# Altium PCB PCB1.PcbDoc
Units mil, origin at the board's own origin, x right, y up, seen from the top; angles counter-clockwise.
Board outline 1181.1 x 590.55 mil, 4 copper layers (Top Layer, gnd1, gnd2, Bottom Layer), stack 62.33 mil thick; 24 components, 18 nets, 101 pads, 65 vias.
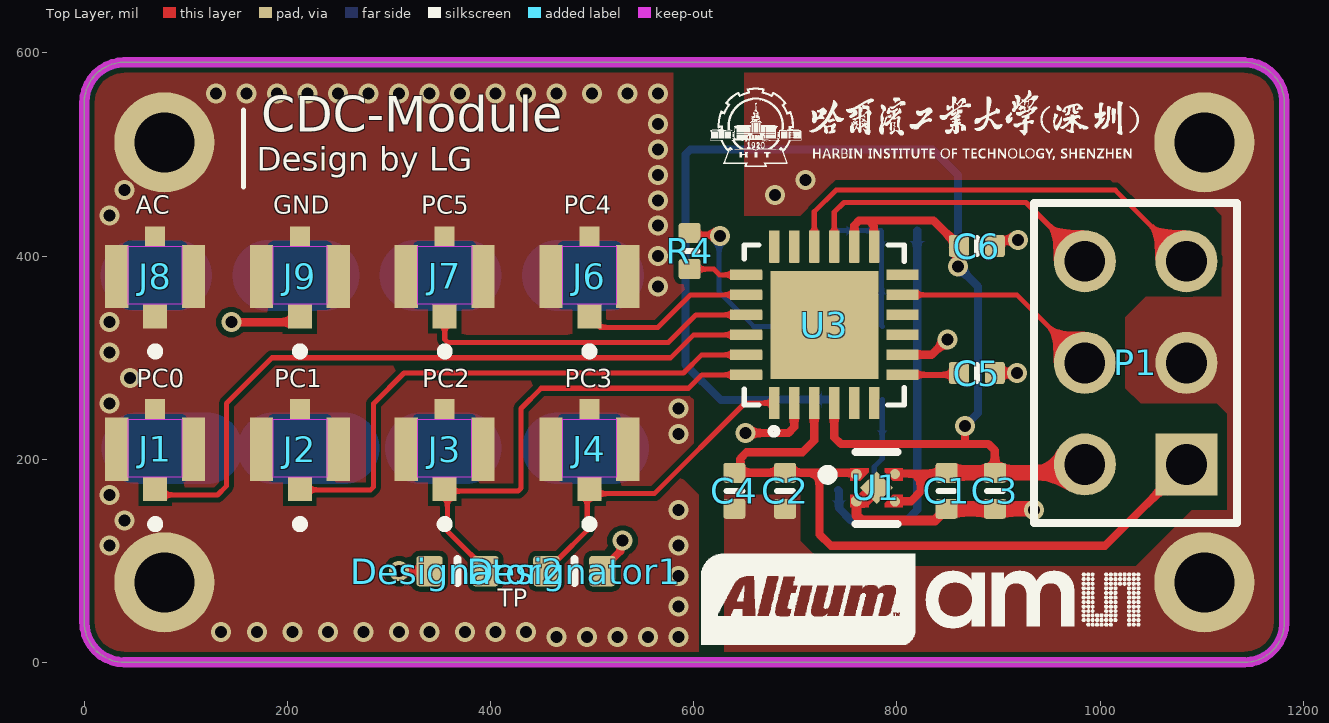
[diagram p0: Top Layer view]
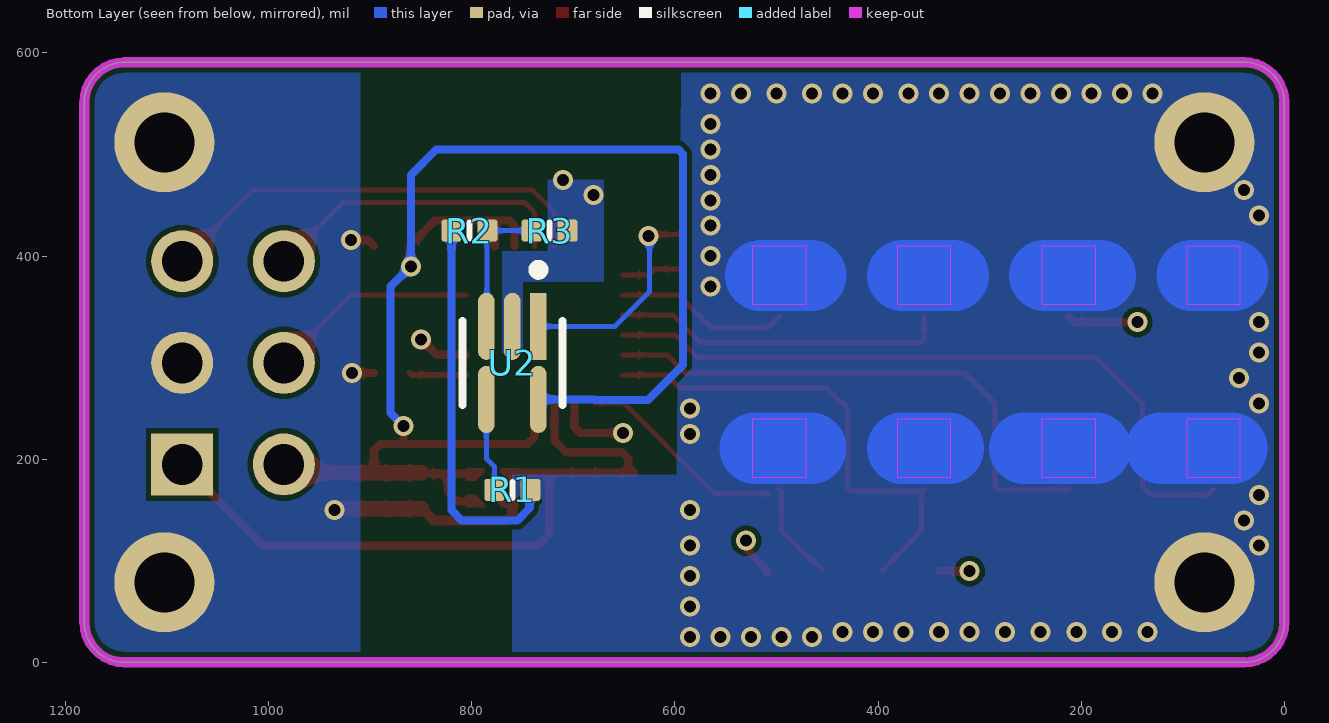
[diagram p1: Bottom Layer view, seen from below]
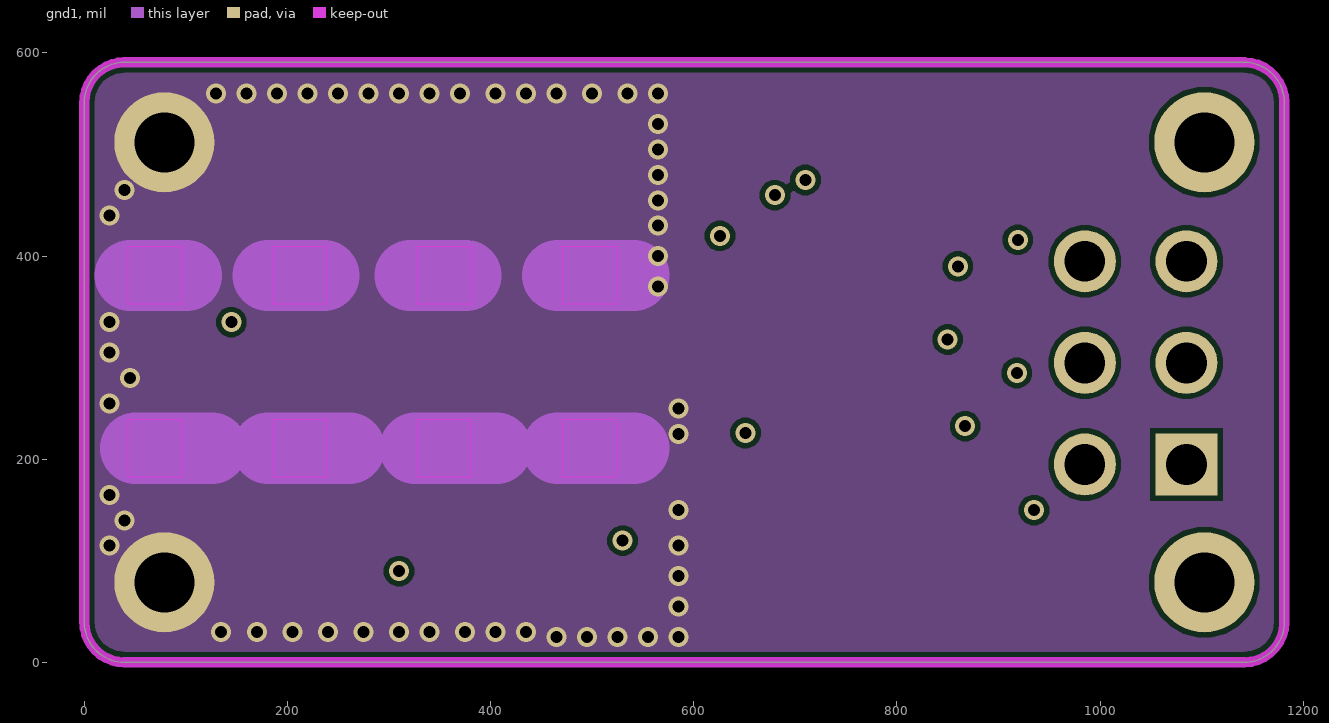
[diagram p2: gnd1]
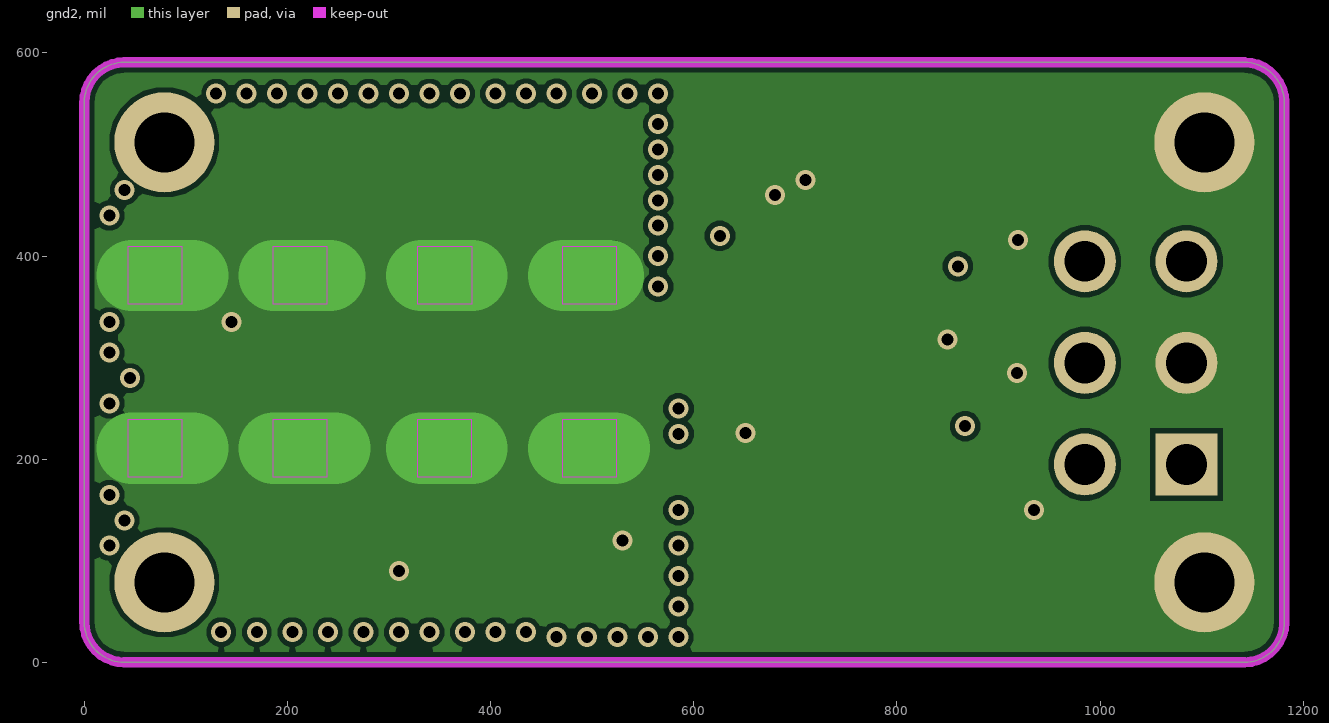
[diagram p3: gnd2]
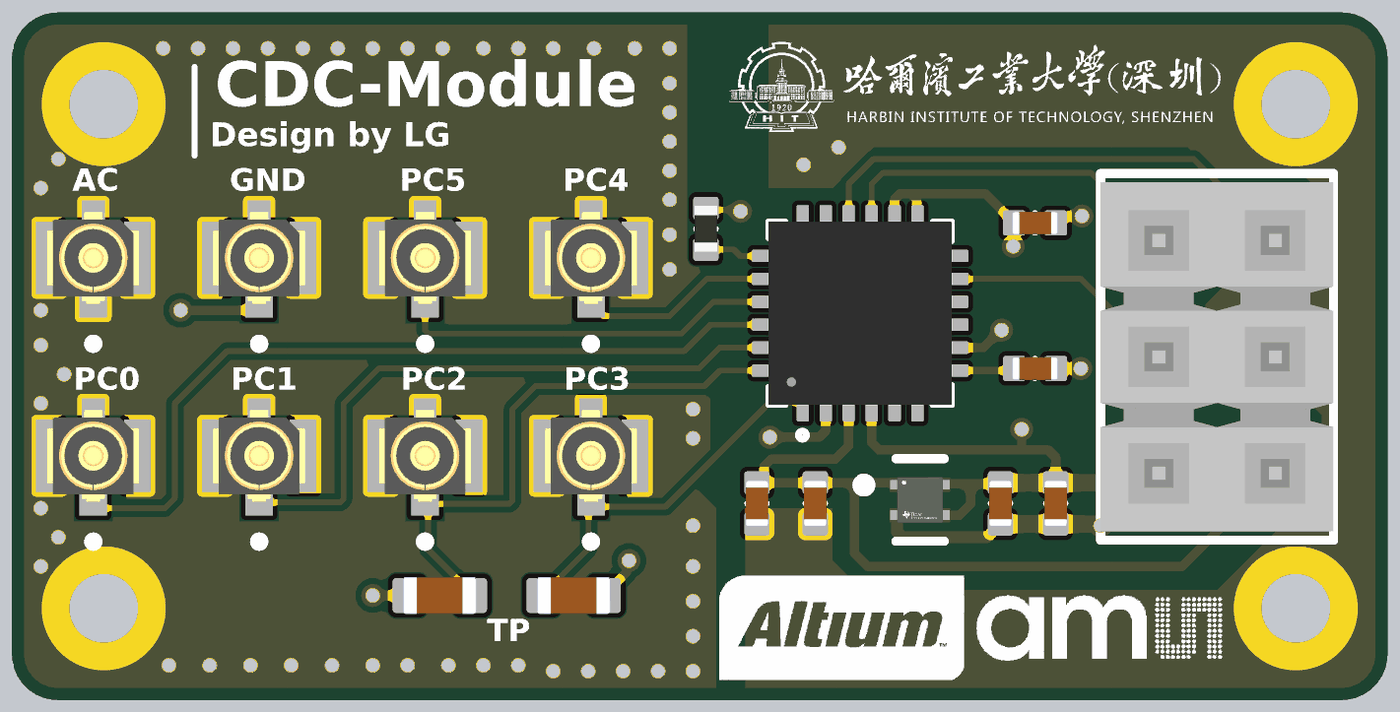
[diagram p4: 3D render of the assembled board from above, using the file's embedded part models]
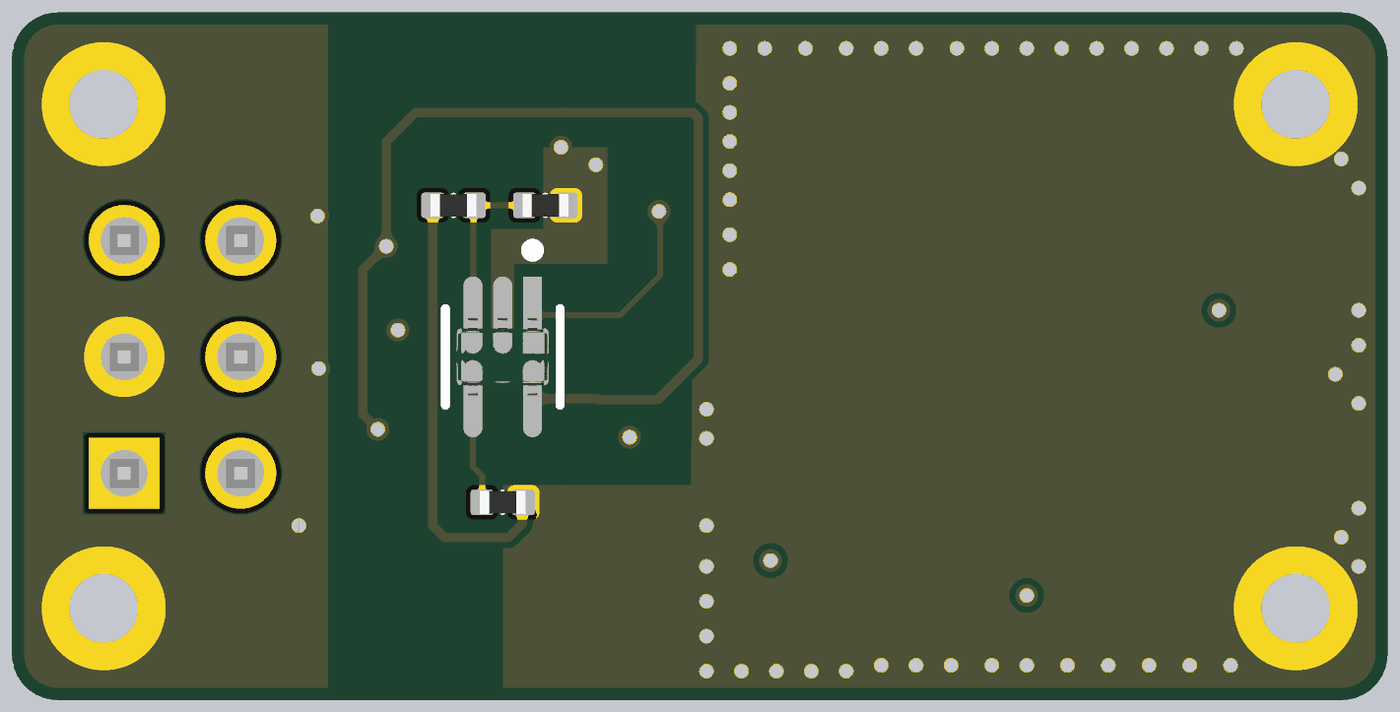
[diagram p5: 3D render of the assembled board from below, using the file's embedded part models]

## Layer stack, top to bottom
Top Solder: solder mask 0.4, Solder Resist, Dk 3.5
Top Layer: signal copper 1.4
Dielectric 2: prepreg 8.2, PP-006, Dk 4.1
gnd1: signal copper 0.6
Dielectric 1: dielectric 41.93, FR-4, Dk 4.8
gnd2: signal copper 0.6
Dielectric 3: prepreg 8.2, PP-006, Dk 4.1
Bottom Layer: signal copper 1.4
Bottom Solder: solder mask 0.4, Solder Resist, Dk 3.5

## Board outline
0.25,39.62 0.25,551.43 cw(c39.62,551.43) 39.62,590.8 1141.98,590.8 cw(c1141.98,551.43) 1181.35,551.43 1181.35,39.62 cw(c1141.98,39.62) 1141.98,0.25 39.62,0.25 cw(c39.62,39.62)

## Design rules (kind name [scope] priority, off if disabled: settings)
Clearance [All] p1: gap=5 ignorepadtopadclearanceinfootprint=FALSE except(8: Arc-Hole Track-Hole SMDPad-Hole THPad-Hole Via-Hole Fill-Hole Poly-Hole Region-Hole Text-Hole)
PlaneConnect [All] p1: planeconnectstyle=Direct reliefexpansion=20 reliefentries=4 reliefconductorwidth=10 reliefairgap=10
PolygonConnect [All] p1: connectstyle=Direct reliefconductorwidth=10 reliefentries=4 polygonreliefangle="90 Angle" airgapwidth=10
RoutingVias [All] p1: holewidth=11.81 width=19.68 viastyle="Through Hole" minholewidth=11.81 minwidth=19.68 maxholewidth=11.81 maxwidth=19.68
SolderMaskExpansion [All] p1: expansion=4 istentingtop=FALSE
Width [All] p1: maxlimit=100 minlimit=4 preferedwidth=5
29 further rules are at their usual default settings.

## Classes and differential pairs
component class Sheet1: C1 C2 C3 C4 C5 C6 J1 R2 R3 U2 U3

## Components (designator, comment, footprint, x,y, rotation, side; value= is the part's Value field where it differs from the comment)
C1 "Capacitor 1µF +/-20% 10V 0402" CAPC0402(1005)60_L 849.04,169.09 r270 top value=1µF
C2 "Capacitor 1µF +/-20% 10V 0402" CAPC0402(1005)60_L 690,169.09 r270 top value=1µF
C3 "Capacitor 10µF +/-40% 6.3V 0402" CAPC0402(1005)60_L 896.45,169.09 r90 top value=10uF
C4 "Capacitor 10µF +/-40% 6.3V 0402" CAPC0402(1005)60_L 640,169.09 r90 top value=4.7uF
C5 "Capacitor 10nF +/-20% 50V 0402" CAPC0402(1005)60_L 878.73,285 r180 top value=10nF
C6 "Capacitor 10µF +/-40% 6.3V 0402" CAPC0402(1005)60_L 878.73,410 r180 top value=10uF
Designator1 "Comment" CAPC0603(1608)100_L 482.56,90 r0 top
Designator2 "Comment" CAPC0603(1608)100_L 367.56,90 r180 top
J1 "PC0-PORT" LINX_CONMHF4-SMD-G-T 70,210 r0 top
J2 "PC1-PORT" LINX_CONMHF4-SMD-G-T 212.45,210 r0 top
J3 "PC2-PORT" LINX_CONMHF4-SMD-G-T 354.91,210 r0 top
J4 "PC3-PORT" LINX_CONMHF4-SMD-G-T 497.36,210 r0 top
J6 "PC4-PORT" LINX_CONMHF4-SMD-G-T 497.36,380 r0 top
J7 "PC5-PORT" LINX_CONMHF4-SMD-G-T 355,380 r0 top
J8 "EXT-Shield" LINX_CONMHF4-SMD-G-T 70,380 r0 top
J9 "GND" LINX_CONMHF4-SMD-G-T 212.45,380 r0 top
P1 "TSW-103-08-L-D" SMTC-TSW-103-08-X-D 1085,195 r90 top locked
R1 "Resistor 10R  +/-1 % 0402 63 mW" RESC0402(1005)_L 760,170 r180 bottom value=68R
R2 "Resistor 10R  +/-1 % 0402 63 mW" RESC0402(1005)_L 802.28,425.17 r0 bottom value=220R
R3 "Resistor 10R  +/-1 % 0402 63 mW" RESC0402(1005)_L 723.38,425.17 r0 bottom value=47K
R4 "Resistor 10R  +/-1 % 0402 63 mW" RESC0402(1005)_L 596.11,405 r90 top value=0R
U1 "LP5907SNX-1.8/NOPB" FP-DQN0004A-MFG 780,172.05 r0 top
U2 "TLV9051IDCKR" FP-DCK0005A-IPC_A 760,295 r270 bottom
U3 "PCAP04" QFN-24-PAD 728.56,332.45 r90 top locked

## Footprints (in the part's own frame and the unit in brackets; to place one, negate y for a bottom-side part, rotate by r counter-clockwise, add the part's x,y. Pads: shape width x height; smd on the part's side, far side on the other; paste and mask are expansions set on the pad)
CAPC0402(1005)60_L [mm] "Chip Capacitor, Body 1.0x0.5mm, Height 0.6mm, IPC High Density"
  rrect25% 0.5x0.55 smd: 1(-0.45,0) 2(0.45,0)
  silkscreen extent 0,-0.2 0,0.2, body extent -0.5,-0.25 0.5,0.25, height 0.6
CAPC0603(1608)100_L [mm] "Chip Capacitor, Body 1.6x0.8mm, Height 1.0mm, IPC High Density"
  rrect25% 0.66x0.76 smd: 1(-0.7,0) 2(0.7,0)
  silkscreen extent 0,-0.3 0,0.3, body extent -0.8,-0.4 0.8,0.4, height 0.95
FP-DCK0005A-IPC_A [mm]
  rect 1.677x0.416 smd paste+0 mask+0: 1(-0.914,0.65)
  rrect100% 1.677x0.416 smd paste+0 mask+0: 2(-0.914,0) 3(-0.914,-0.65) 4(0.914,-0.65) 5(0.914,0.65)
  silkscreen extent -2.45,-1.25 1.05,1.25, body extent -1.1,-1 1.1,1, height 1.1
FP-DQN0004A-MFG [mm]
  round 0.279 smd paste-1000 mask-1000: 1(-0.505,0.33) 2(-0.505,-0.33)
  round 0.251 smd paste-1000 mask-1000: 3(0.459,-0.346) 4(0.459,0.346)
  rect 0.58x0.58 smd rot 135 paste-1000 mask-1000: 5(0,0)
  Top Layer region: -0.66,-0.485 -0.2,-0.485 -0.2,-0.385 -0.41,-0.175 -0.66,-0.175
  Top Layer region: 0.66,0.485 0.2,0.485 0.2,0.385 0.41,0.175 0.66,0.175
  Top Layer region: 0.66,-0.485 0.2,-0.485 0.2,-0.385 0.41,-0.175 0.66,-0.175
  Top Layer region: -0.66,0.485 -0.2,0.485 -0.2,0.385 -0.41,0.175 -0.66,0.175
  silkscreen extent -1.35,-0.9 0.53,0.9, body extent -0.76,-0.63 0.76,0.63, height 0.25
LINX_CONMHF4-SMD-G-T [mm]
  rect 0.6x0.6 smd: 1(0,-1)
  rect 0.58x1.58 smd: S1(-0.96,0) S3(0.96,0)
  rect 0.5x0.5 smd: S2(0,1)
  Keep-Out Layer region: 0.67,-0.7 -0.67,-0.7 -0.67,0.75 0.67,0.75
  Keep-Out Layer region: 0.67,-0.7 -0.67,-0.7 -0.67,0.75 0.67,0.75
  Keep-Out Layer region: 0.67,-0.7 -0.67,-0.7 -0.67,0.75 0.67,0.75
  silkscreen extent -0.1,-1.97 0.1,-1.77, body extent -1,-1 1,1, height 0.6
QFN-24-PAD [mm]
  rrect21% 0.81x0.27 smd: 1(-1.955,1.25) 2(-1.955,0.75) 3(-1.955,0.25) 4(-1.955,-0.25) 5(-1.955,-0.75) 6(-1.955,-1.25) 13(1.955,-1.25) 14(1.955,-0.75) 15(1.955,-0.25) 16(1.955,0.25) 17(1.955,0.75) 18(1.955,1.25)
  rrect21% 0.27x0.81 smd: 7(-1.25,-1.955) 8(-0.75,-1.955) 9(-0.25,-1.955) 10(0.25,-1.955) 11(0.75,-1.955) 12(1.25,-1.955) 19(1.25,1.955) 20(0.75,1.955) 21(0.25,1.955) 22(-0.25,1.955) 23(-0.75,1.955) 24(-1.25,1.955)
  rect 2.7x2.7 smd paste-0.495: NC(0,0)
  silkscreen extent -2.74,-2 2,2, body extent -2.01,-2.01 2.01,2.01, height 0.86
RESC0402(1005)_L [mm] "Chip Resistor, Body 1.0x0.5mm, IPC High Density"
  rrect25% 0.5x0.55 smd: 1(-0.45,0) 2(0.45,0)
  silkscreen extent 0,-0.2 0,0.2, body extent -0.5,-0.25 0.5,0.25, height 0.3
SMTC-TSW-103-08-X-D [mm] ".025 SQ Post Terminal Strip Assembly, 2x3 Pins, Vertical, 2.54mm Pitch, Male"
  rect 1.55x1.55 hole 1.02: 1(0,0)
  round 1.55 hole 1.02: 2(0,2.54) 3(2.54,0) 4(2.54,2.54) 5(5.08,0) 6(5.08,2.54)
  silkscreen extent -1.46,-1.27 6.54,3.81, body extent -1.27,-1.27 6.35,3.81, height 8.38

## Part data
C1 C2: library part CMP-001-00063-3, "Chip Capacitor, 1µF +/-20%, 10V, 0402, Thickness 0.6 mm", Case/Package=0402, Max Operating Temperature=85°C, Min Operating Temperature=-55°C, Tolerance=10%, Voltage Rating=10V, Mounting Technology=SMT, Pins=2
C3 C4 C6: library part CMP-001-00074-3, "Chip Capacitor, 10µF +/-40%, 6.3V, 0402, Thickness 0.6 mm", Case/Package=0402, Max Operating Temperature=85°C, Min Operating Temperature=-55°C, Tolerance=10%, Voltage Rating=6.3V, Mounting Technology=SMT, Pins=2
C5: library part CMP-001-00069-3, "Chip Capacitor, 10nF +/-20%, 50V, 0402, Thickness 0.6 mm", Case/Package=0402, Max Operating Temperature=85°C, Min Operating Temperature=-55°C, Tolerance=5%, Voltage Rating=50V, Mounting Technology=SMT, Pins=2
J1 J2 J3 J4 J6 J7 J8 J9: library part CMP-002-00072-1, "IPEX MHF4 Connector Jack, Male Pin 50Ohm Surface Mount Solder", Case/Package=None, Availability="In Stock", Check_prices=https://www.snapeda.com/parts/CONMHF4-SMD-G-T/Linx/view-part/?ref=eda, Component Type=Standard, Design Item ID=CONMHF4-SMD-G-T, MF="Linx Technologies Inc.", MP=CONMHF4-SMD-G-T, Pins=4, Price=None, Purchase-URL=https://pricing.snapeda.com/search/part/CONMHF4-SMD-G-T/?ref=eda, SnapEDA_Link=https://www.snapeda.com/parts/CONMHF4-SMD-G-T/Linx/view-part/?ref=snap, Source=CONMHF4-SMD-G-T.SchLib
P1: library part CMP-1024-00336-1, "0.025\" SQ Post Header, Through-hole, Vertical, -55 to 125 degC, 2.54 mm Pitch, 6-Pin, Male, RoHS", Manufacturer=Samtec, Temperature Range="-55 to 125 degC", ComponentLink1Description="Manufacturer URL", ComponentLink1URL=http://www.samtec.com, ComponentLink2Description=Datasheet, ComponentLink2URL=http://www.samtec.com/documents/webfiles/pdf/TSW_TH.PDF, ComponentLink3Description="Package Specification", ComponentLink3URL=http://www.samtec.com/documents/webfiles/cpdf/TSW-XXX-XX-XXX-X-XX-XXX-MKT.pdf, DatasheetVersion=F-214, Mounting Technology=Through-hole, Orientation=Vertical, PackageDescription=".025[0.64] SQ. Post Terminal Strip Assembly", PackageReference=TSW-103-08-X-D, PackageVersion="DM, 8/1988", PartNumber=TSW-103-08-L-D, Pitch="2.54 mm", RoHS=True
R1 R2 R3 R4: library part CMP-009-00152-3, "Chip Resistor, 10 Ohms, +/-1 %, 63 mW, -55 to 155 degC, 0402", Case/Package=0402, Max Operating Temperature=155°C, Min Operating Temperature=-55°C, Power=63mW, Tolerance=1%, Pins=2
U1: library part CMP-04917-000185-2, "None"
U2: library part CMP-04895-000451-1, "IC OPAMP GP 1 CIRCUIT SC70-5"
U3: "CDC IC"

## Free pads (board coordinates)
  round 98.43 hole 59.06: 1(78.99,78.99) 1(78.99,512.06) 1(1102.61,78.99) 1(1102.61,512.06)

## Via types
v1: diameter 19.68, hole 11.81, Top Layer to Bottom Layer, tented both sides, 65 vias

## Nets (pads, with @x,y where several pads share a name; then routed paths per layer and width w, separated by ;. In a path a pad name is that pad's centre, name@x,y a point inside that pad or via, vN(x,y) a via of type N, cw(c..) or ccw(c..) an arc to the next point about the centre after c; other vN are vias at no path point)
1V8: C2.1 C4.2 P1.1 U1.1 U3.3 | length 714
  Top Layer w8: U3.3 718.72,218.72 707,207 652,207 646,201 646,192.65 640.16,186.81 C4.2 C2.1 723.77,186.81 ; U1.1 759.31,185.04 757.54,186.81 723.77,186.81 ; P1.1 1005,115 735,115 723.77,126.23 723.77,186.81
3V3: C1.1 C3.2 C6.2 P1.2 U1.3 U1.4 U2.5 U3.4 U3.13 U3.14 | length 1566.2
  Top Layer w8: U3.4 738.41,221.59 745,215 870,215 ; U3.14 758.09,430.31 762.78,435 772.41,435 ; U3.13 777.09,410.1 777.09,430.31 772.41,435 ; U1.3 798.44,158.8 813.8,158.8 823.34,168.34 823.34,186.01 ; U1.4 798.44,186.01 823.34,186.01 ; C1.1 848.24,186.01 823.34,186.01 ; v1(860,390) 861.01,391.01 C6.2 861.01,410.98 855.17,416.83 854.19,416.83 836.01,435 772.41,435 ; v1(867.24,232.76) 867.24,217.76 870,215 ; C3.2 896.45,208.55 890,215 870,215
  Top Layer w15: C1.1 C3.2 976.81,186.81 P1.2
  Bottom Layer w8: U2.5 678.97,259.03 678.25,258.31 626.69,258.31 592,293 592,500.31 596.69,505 835,505 860,480 v1(860,390) 880,370 880,245.53 v1(867.24,232.76)
AC-Shield: J1.S1 J1.S2 J1.S3 J2.S1 J2.S2 J2.S3 J3.S1 J3.S2 J3.S3 J4.S1 J4.S2 J4.S3 J6.S1 J6.S2 J6.S3 J7.S1 J7.S2 J7.S3 J8.1 J8.S1 J8.S2 J8.S3 J9.S1 J9.S2 J9.S3 pad.1@78.99,78.99 pad.1@78.99,512.06 R1.2 R2.2 | length 1374.1
  Top Layer w8: pad.1@72.28,85.7 pad.1@78.99,78.99
  gnd1 w70: 45.5,381 101,381 ; 50.5,211 126,211 ; 181,211 261,211 ; 181,381 236,381 ; 321,381 376,381 ; 326,211 406,211 ; 466,211 541,211 ; 466,381 541,381
  Bottom Layer w8: R1.2 743.14,169.14 743.14,151.86 755,140 810,140 820,150 R2.2
  Bottom Layer w70: 51,381 91,381 ; 52,211 121,211 ; 181,381 236,381 ; 186,211 256,211 ; 326,381 376,381 ; 331,211 376,211 ; 466,211 521,211 ; 466,381 516,381
  other v1: 465,25 495,25 525,25 555,25 585,25 135,30 170,30 205,30 240,30 275,30 310,30 340,30 375,30 405,30 435,30 585,55 585,85 25,115 585,115 40,140 585,150 25,165 585,225 585,250 25,255 45,280 25,305 25,335 565,370 565,400 565,430 25,440 565,455 40,465 565,480 565,505 565,530 130,560 160,560 190,560 220,560 250,560 280,560 310,560 340,560 370,560 405,560 435,560 465,560 500,560 535,560 565,560
GND: C1.2 C2.2 C3.1 C4.1 C5.1 C6.1 Designator1.2 Designator2.2 J9.1 P1.3 pad.1@1102.61,78.99 pad.1@1102.61,512.06 R3.1 U1.2 U1.5 U2.2 U3.2 U3.8 | length 963.3
  Top Layer w8: v1(145,335) 206.82,335 J9.1 ; v1(310,90) Designator2.2 ; Designator1.2@508.35,88.23 Designator1.2 510.12,91.96 527.76,109.61 527.76,117.76 v1(530,120) ; v1(651,226) 693.35,226 699.03,231.69 U3.2 ; U1.2 760.69,159.63 766.59,159.63 ; U1.5@779.02,172.05 U1.5 ; U3.8 834.19,302.92 849.26,318 v1(850,318) ; C1.2@842.21,144.69 842.21,145.54 848.05,151.38 C1.2 ; C5.1 v1(918,285) ; C6.1 896.45,410.16 902.29,416 v1(919,416) ; v1@933.62,151.38 v1(935,150)
  Top Layer w10: U1.2 760.12,144.69 764.8,140 837.52,140 C1.2@842.21,144.69
  Top Layer w15: 766.59,159.63 U1.5@779.02,172.05 ; C1.2 C3.1 v1@933.62,151.38
  gnd2 w70: 47,211 107,211 ; 47,381 107,381 ; 187,211 247,211 ; 187,381 242,381 ; 332,211 382,211 ; 332,381 382,381 ; 472,211 522,211 ; 472,381 516,381
  other v1: 680,460 710,475
I2C_SCL: P1.5 U3.16 | length 438.4
  Top Layer w5: U3.16 718.72,443.72 740,465 1015,465 P1.5
I2C_SDA: P1.6 U3.15 | length 308.5
  Top Layer w5: U3.15 738.41,443.41 747.93,452.93 927.07,452.93 P1.6
"INTN PG5": P1.4 U3.11 | length 207.2
  Top Layer w5: U3.11 918.02,361.98 P1.4
NetC5_2: C5.2 U3.7 | length 56.2
  Top Layer w6: U3.7 859.25,283.24 C5.2
NetR1_1: R1.1 U2.4 | length 92.3
  Bottom Layer w5: R1.1 777.72,192.72 785.59,200.59 U2.4
NetR2_1: R2.1 R3.2 U2.3 | length 138.1
  Bottom Layer w5: R3.2 R2.1 785.08,424.66 785.08,331.48 U2.3
NetR4_1: R4.1 U3.19 | length 57.8
  Top Layer w5: R4.1 619.89,387.28 625.51,381.66 U3.19
NetR4_2: R4.2 U2.1 | length 209.7
  Top Layer w5: R4.2 597.47,421.36 624.48,421.36 v1(625.84,420)
  Bottom Layer w5: v1(625.84,420) 625,419.16 625,365 659.03,330.97 U2.1
PC0: J1.1 U3.22 | length 696.9
  Top Layer w5: J1.1 75.63,165 131.35,165 140,173.65 140,255 185,300 577.39,300 600,322.61 U3.22
PC1: J2.1 U3.23 | length 542.5
  Top Layer w5: J2.1 213.08,170 282.07,170 285,172.93 285,255 315,285 590,285 607.92,302.92 U3.23
PC2: Designator2.1 J3.1 U3.24 | length 485.4
  Top Layer w5: J3.1 J3.1@356.83,168.71 ; Designator2.1 395.12,91.96 357.56,129.52 357.56,167.98 J3.1@356.83,168.71 ; U3.24 608.24,283.24 595,270 450,270 430,250 430,171.64 427.07,168.71 369.91,168.71 J3.1@356.83,168.71
PC3: Designator1.1 J4.1 U3.1 | length 308
  Top Layer w5: Designator1.1 455,91.55 465.44,102 467,102 495.24,130.24 495.24,168.51 J4.1 ; J4.1@507.36,166.26 561.26,166.26 650.48,255.48 U3.1
PC4: J6.1 U3.20 | length 171.9
  Top Layer w5: J6.1 507.99,330 565,330 596.98,361.98 U3.20
PC5: J7.1 U3.21 | length 331.8
  Top Layer w5: J7.1 355,317.93 357.93,315 575,315 602.29,342.29 U3.21
pads on no net: U3.5 U3.6 U3.9 U3.10 U3.12 U3.17 U3.18 U3.NC

## Polygon pours and split planes (outlines as drawn)
AC-Shield on Top Layer "AC-SHIELD_L01_P001" (solid, remove dead copper, pour order 1): 0,620 0,0 620,0 615,5 615,620
GND on Top Layer "GND_L01_P009" (solid, remove dead copper, pour order 9): 630,165 705,165 705,120 730,95 1035,95 1090,150 1125,150 1125,245 1115,255 1040,255 1025,270 1025,340 1045,360 1120,360 1120,440 1110,450 1035,450 1010,475 740,475 705,440 650,440 650,595 1195,595 1195,5 1190,0 630,0
AC-Shield on Bottom Layer "AC-SHIELD_L04_P004" (solid, remove dead copper, pour order 4): 0,0 0,615 593.38,615 598.38,185 760,185 760,0
GND on Bottom Layer "GND_L04_P006" (solid, pour order 6): 670,490 725,490 725,405 770,405 770,305 750,305 750,375 670,375
GND on Bottom Layer "GND_L04_P007" (solid, remove dead copper, pour order 7): 1200,0 1195,5 910,5 910,605 925,620 1200,620
AC-Shield on gnd1 "AC-SHIELD_L02_P003" (solid, remove dead copper, pour order 3): 0,0 0,630 20,610 1205,610 1205,5 1200,0
GND on gnd2 "GND_L03_P000" (solid, remove dead copper, pour order 0): 0,620 1195,620 1195,0 0,0

## Keep-outs
Keep-Out Layer:
  the board outline again, w10

## Other copper
Top Layer:
  pour cut-out: 590,185 590,180 605,165 605,10 614.55,10 615,10.45 615,215
  pour cut-out: 597.93,262.94 600,260.86 600,215 615,215 635,235 629.92,240.08 629.92,283.24 608.24,283.24 601.62,276.62
  pour cut-out: 580,590 580,394.8 587.52,387.28 619.89,387.28 619.89,589.89 620,590

## Silkscreen, mask and mechanical layers (free items; w line width, h text height)
Top Overlay:
  drawing of 455 lines, arcs and shapes, not listed
  text "CDC-Module" at 174.29,510.5 h60
  text "Design by LG" at 170,476.12 h40
  text "AC" at 51,436 h30
  text "GND" at 186,436 h30
  text "PC5" at 332,436 h30
  text "PC4" at 472,436 h30
  text "PC0" at 52,265 h30
  text "PC1" at 187,265 h30
  text "PC2" at 333,265 h30
  text "PC3" at 473,265 h30
  text "TP" at 407,49 h30
Mechanical 1:
  the board outline again, w10